# Altium PCB PC110.PcbDoc (part 11 of 24)
Units mm, origin at the board's own origin, x right, y up, seen from the top; angles counter-clockwise.
Board outline 150.05 x 107.35 mm, 10 copper layers (In2.Cu, F.Cu, B.Cu, In1.Cu, In3.Cu, In4.Cu, In5.Cu, In6.Cu, In7.Cu, In8.Cu); 936 components, 1434 nets, 4891 pads, 6088 vias.
Unrouted connection lines stored in the file: 2995.
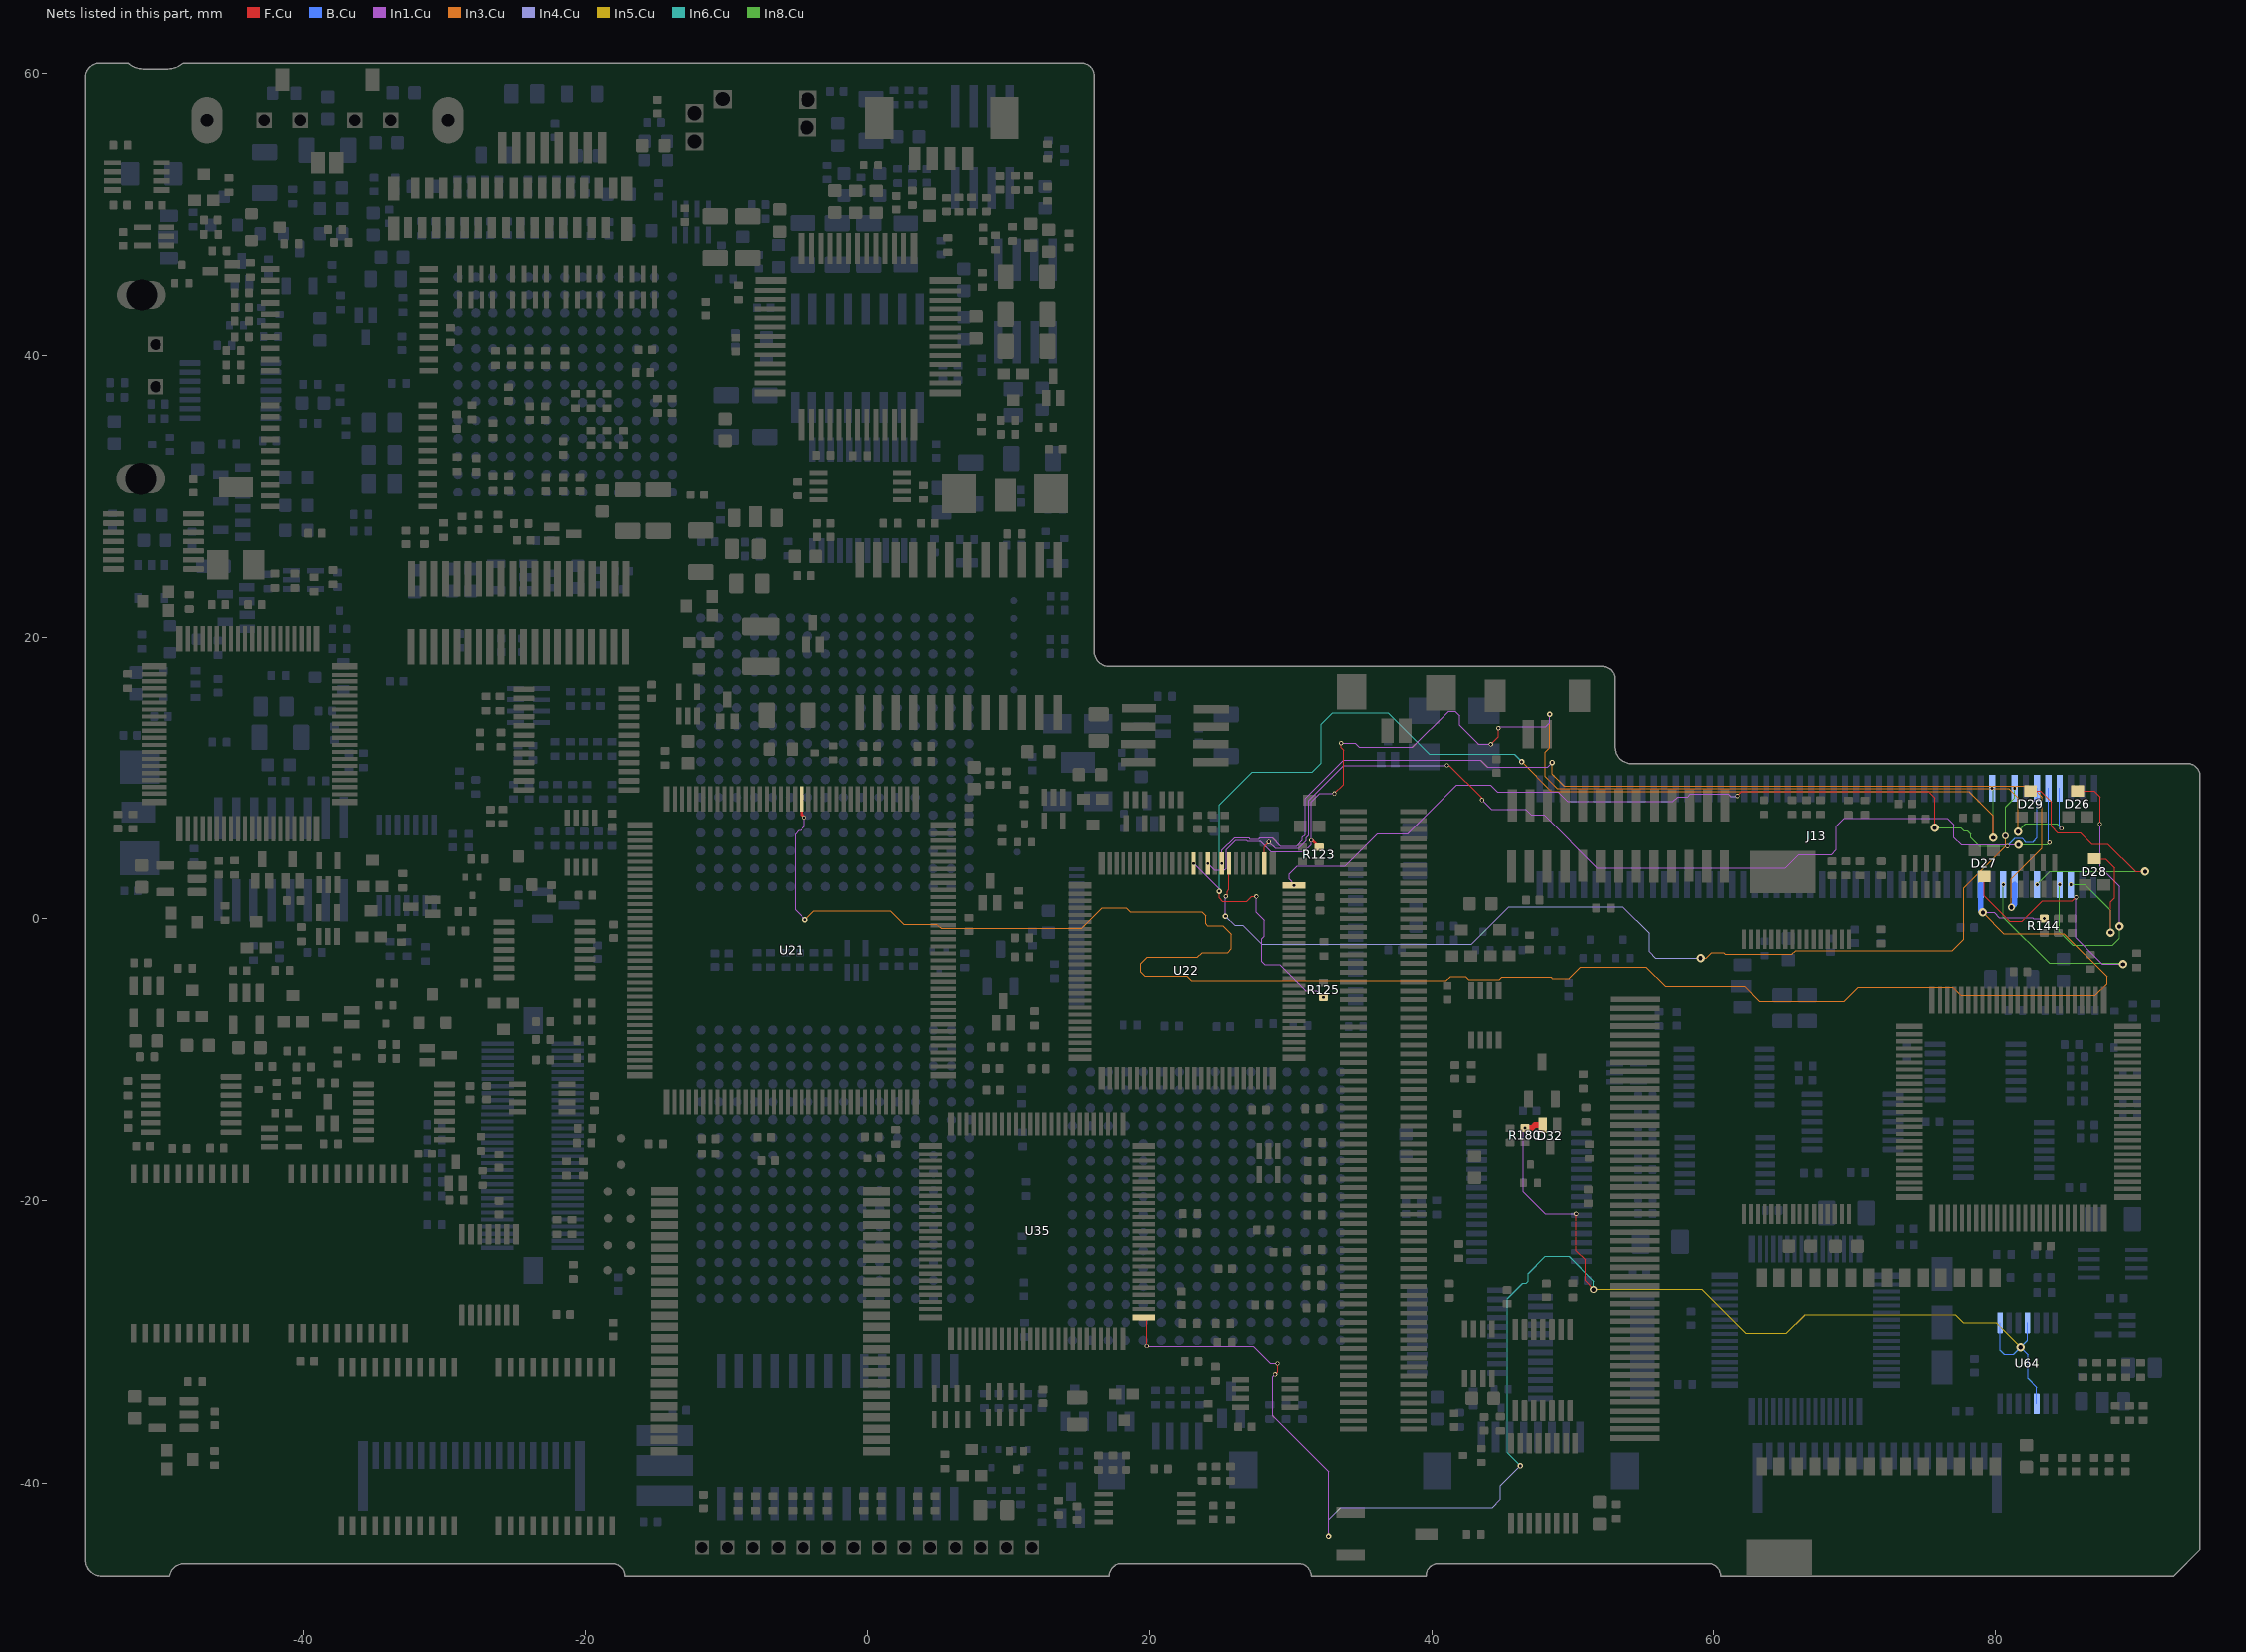
[diagram p18: the nets of this part, all layers, seen from the top]

## Via types
v1: diameter 0.3, hole 0.2, B.Cu to In8.Cu, tented both sides, 1934 vias
v2: diameter 0.4, hole 0.2, F.Cu to B.Cu, tented both sides, 1902 vias
v3: diameter 0.3, hole 0.2, F.Cu to In1.Cu, tented both sides, 1729 vias
v4: diameter 0.6, hole 0.3, F.Cu to B.Cu, tented both sides, 354 vias
v5: diameter 0.5, hole 0.3, F.Cu to B.Cu, tented both sides, 136 vias
v6: diameter 0.4, hole 0.2, B.Cu to In8.Cu, tented both sides, 12 vias
v7: diameter 0.3, hole 0.2, F.Cu to B.Cu, tented both sides, 6 vias
v8: diameter 0.6, hole 0.2, F.Cu to B.Cu, tented both sides, 4 vias
v9: diameter 0.5, hole 0.2, B.Cu to In8.Cu, tented both sides, 3 vias
v10: diameter 0.5, hole 0.2, F.Cu to B.Cu, tented both sides, 2 vias
v11: diameter 0.4, hole 0.3, F.Cu to B.Cu, tented both sides, 2 vias
v12: diameter 0.3, hole 0.2, F.Cu to In4.Cu, tented both sides, 2 vias
v13: diameter 0.6, hole 0.3, B.Cu to In8.Cu, tented both sides, 1 vias
v14: diameter 0.3, hole 0.2, F.Cu to In3.Cu, tented both sides, 1 vias

## Nets (pads, with @x,y where several pads share a name; then routed paths per layer and width w, separated by ;. In a path a pad name is that pad's centre, name@x,y a point inside that pad or via, vN(x,y) a via of type N, cw(c..) or ccw(c..) an arc to the next point about the centre after c; other vN are vias at no path point) (continued)
FDC_UART1_EN: D32.1 R180.2 U35.76 U64.1 U64.4 U64.10 | length 123.7
  F.Cu w0.08: U35.76@19.61,-28.25 19.82,-28.46 v3(19.82,-30.26) ; v3(28.9,-32.27) 29.07,-32.1 v3(29.07,-31.5) ; v3(50.27,-20.91) 50.27,-23.52 50.92,-24.17 50.92,-25.66 51.5,-26.24 v5(51.5,-26.28) ; v5@51.44,-26.34 v5@51.44,-26.29
  F.Cu w0.4: v3(46.64,-14.78) 47.14,-14.78 47.35,-14.57 D32.1@47.91,-14.57
  In1.Cu w0.08: v3(19.82,-30.26) 19.83,-30.27 27.34,-30.27 28.57,-31.5 v3(29.07,-31.5) ; v3(28.9,-32.27) 28.73,-32.44 28.73,-35.2 32.68,-39.15 v2(32.68,-43.8) ; v3(46.64,-14.78) 46.5,-14.92 46.5,-19.35 48.06,-20.91 v3(50.27,-20.91)
  In4.Cu w0.08: v2(32.68,-43.8) 32.68,-42.63 33.54,-41.77 44.32,-41.77 44.9,-41.19 44.9,-40.14 v2(46.3,-38.74)
  In5.Cu w0.08: v5(51.5,-26.28) 51.52,-26.26 59.14,-26.26 62.26,-29.38 65.19,-29.38 66.52,-28.05 77.12,-28.05 77.7,-28.63 80.03,-28.63 v4(81.76,-30.36)
  In6.Cu w0.08: v2(46.3,-38.74) 45.39,-37.83 45.39,-26.91 46.47,-25.83 46.72,-25.83 46.86,-25.69 46.86,-25.14 48.08,-23.92 49.75,-23.92 51.5,-25.67 v5(51.5,-26.28)
  B.Cu w0.08: U64.1@80.31,-28.627 80.31,-30.56 80.6,-30.85 81.27,-30.85 v4(81.76,-30.36) ; U64.4@82.26,-28.627 82.26,-29.86 v4(81.76,-30.36) ; U64.10@82.91,-34.353 82.91,-33.19 82.28,-32.56 82.28,-30.88 v4(81.76,-30.36)
FDC_WDATA#: J13.8 U22.7 | length 73.3
  F.Cu w0.08: v3(25.41,1.61) 25.5,1.7 25.5,1.96 25.63,2.09 U22.7@25.63,3.94
  In1.Cu w0.08: v2(25.38,0.19) 25.38,1.58 v3(25.41,1.61)
  In3.Cu w0.08: v4(59.05,-2.77) 59.47,-2.77 59.84,-2.4 60.7,-2.4 60.8,-2.5 65.58,-2.5 65.85,-2.23 76.91,-2.23 77.72,-1.42 77.72,2.2 80.69,5.17 v5(80.69,5.9)
  In4.Cu w0.08: v2(25.38,0.19) 26.03,-0.46 26.61,-0.46 27.94,-1.79 42.84,-1.79 45.5,0.87 53.53,0.87 55.42,-1.02 55.42,-2.33 55.86,-2.77 v4(59.05,-2.77)
  In8.Cu w0.08: v5(80.69,5.9) 80.69,7.97 81.34,8.62 v1(81.34,9.3)
FDC_WGATE#: J13.93 U22.8 | length 76.2
  In1.Cu w0.08: v3(25.13,3.94) 25.13,4.88 26.03,5.78 27.03,5.78 27.12,5.69 27.74,5.69 27.82,5.77 28.69,5.77 29.265,5.195 30.415,5.195 30.825,5.605 30.825,5.805 31.02,6 31.02,8.57 33.76,11.31 43.47,11.31 43.97,10.81 48.24,10.81 v2(48.56,11.13)
  In3.Cu w0.08: v2(48.56,11.13) 48.56,10.31 49.41,9.46 82.51,9.46 83.29,8.68 83.29,5.02 81.11,2.84 v5(81.11,0.83)
  B.Cu w0.4: v5(81.11,0.83) 81.34,1.06 J13.93@81.34,2.45
FDC_WRTPRT#: J13.10 R125.1 U22.12 | length 89.9
  F.Cu w0.08: v2(24.94,1.97) 24.94,1.49 25.16,1.27 26.9,1.27 27.23,1.6 v3(27.57,1.6)
  In1.Cu w0.08: v3(23.13,3.94) 24.94,2.13 v2(24.94,1.97) ; v3(27.57,1.6) 27.57,0.46 28.12,-0.09 28.12,-1.23 27.94,-1.41 27.94,-3.01 28.15,-3.22 29.23,-3.22 31.07,-5.06 31.85,-5.06 v3(32.32,-5.53)
  In3.Cu w0.08: v2(46.4,11.18) 48.5,9.08 78.09,9.08 79.82,7.35 v4(79.82,5.77)
  In6.Cu w0.08: v2(24.94,1.97) 24.94,8.1 27.29,10.45 31.54,10.45 32.17,11.08 32.17,13.84 32.99,14.66 36.89,14.66 39.84,11.71 45.87,11.71 v2(46.4,11.18)
  In8.Cu w0.08: v1(79.74,9.3) 79.82,9.22 v4(79.82,5.77)
FDD_Bowman: J13.90 R144.2 U21.125 | length 139.7
  F.Cu w0.25: U21.125@-4.68,8.535 -4.68,7.42 v3(-4.48,7.22)
  In1.Cu w0.08: v3(-4.48,7.22) -4.48,6.58 -4.76,6.3 -4.88,6.3 -5.14,6.04 -5.14,0.65 v2(-4.43,-0.06) ; v4(79.09,0.46) 79.89,0.46 80.26,0.09 82.61,0.09 82.67,0.03 v3(83.44,0.03)
  In3.Cu w0.08: v2(-4.43,-0.06) -3.8,0.57 1.63,0.57 2.56,-0.36 4.91,-0.36 5.215,-0.665 15.155,-0.665 16.6,0.78 18.38,0.78 18.66,0.5 23.72,0.5 23.98,0.24 23.98,-0.35 24.1,-0.47 25.21,-0.47 25.81,-1.07 25.81,-2.11 25.55,-2.37 23.73,-2.37 23.38,-2.72 19.84,-2.72 19.4,-3.16 19.4,-3.77 19.67,-4.04 22.65,-4.04 22.98,-4.37 41.05,-4.37 41.34,-4.08 42.41,-4.08 42.63,-4.3 44.81,-4.3 44.985,-4.125 48.495,-4.125 48.58,-4.21 49.77,-4.21 50.57,-3.41 55.19,-3.41 56.54,-4.76 62.16,-4.76 63.21,-5.81 69.29,-5.81 70.27,-4.83 76.94,-4.83 77.52,-5.41 87.06,-5.41 87.9,-4.57 87.9,-4.09 84.84,-1.03 80.58,-1.03 v4(79.09,0.46)
  B.Cu w0.4: J13.90@78.94,2.45 78.94,0.61 v4(79.09,0.46)
FDD_DRSEL: J13.5 U22.2 | length 72.1
  F.Cu w0.08: U22.2@28.13,3.94 28.13,5.15 v3(28.45,5.47) ; v3(41.09,10.92) 41.26,10.92 43.58,8.6 v3(43.58,8.46)
  In1.Cu w0.08: v3(28.45,5.47) 28.895,5.025 30.565,5.025 31.105,5.565 31.105,5.785 31.26,5.94 31.26,8.43 33.75,10.92 v3(41.09,10.92) ; v3(43.58,8.46) 44.26,7.78 46.69,7.78 47.08,7.39 48,7.39 51.75,3.64 65.1,3.64 66.055,4.595 68.385,4.595 68.71,4.92 68.71,6.59 69.29,7.17 76.57,7.17 77.04,6.7 77.04,5.77 77.54,5.27 v4(81.61,5.27)
  In8.Cu w0.08: v4(81.61,5.27) 83.66,5.27 v1(83.82,5.43)
  B.Cu w0.08: J13.5@83.74,9.3 83.74,5.51 v1(83.82,5.43)
FDD_INDEX#: J13.4 R123.2 U22.10 | length 85.7
  F.Cu w0.08: v3(33.09,8.92) 33.75,9.58 33.75,12.01 33.57,12.19 v3(33.57,12.5) ; v3(44.21,12.42) 44.75,12.96 v3(44.75,13.56)
  F.Cu w0.2: v3(31.45,5.59) 31.53,5.59 R123.2@32.02,5.1
  In1.Cu w0.08: v3(24.13,3.94) 24.6,3.47 25.31,3.47 25.44,3.6 25.44,4.93 26.11,5.6 26.86,5.6 26.94,5.52 27.86,5.52 28.6,4.78 30.93,4.78 31.45,5.3 v3(31.45,5.59) 31.45,8.32 32.05,8.92 v3(33.09,8.92) ; v3(33.57,12.5) 34.56,12.5 34.85,12.21 38.64,12.21 41.2,14.77 41.66,14.77 41.98,14.45 41.98,13.76 43.32,12.42 v3(44.21,12.42) ; v3(44.75,13.56) 44.87,13.68 48.12,13.68 48.39,13.95 v2(48.39,14.55)
  In3.Cu w0.08: v2(48.39,14.55) 48.39,12.18 48.07,11.86 48.07,10.13 48.93,9.27 80.92,9.27 81.58,8.61 v4(81.58,6.21)
  In8.Cu w0.08: v4(81.58,6.21) 82.13,6.76 84.34,6.76 v1(84.66,6.44)
  B.Cu w0.08: J13.4@84.54,9.3 84.54,6.56 v1(84.66,6.44)
FDD_MOTEN: J13.6 U22.100 | length 64.6
  F.Cu w0.08: v3(61.66,8.75) 61.98,9.07 75.21,9.07 75.67,8.61 v4(75.67,6.47)
  In1.Cu w0.08: v3(30.23,2.39) 30.23,2.48 29.88,2.83 29.88,3.2 30.46,3.78 33.87,3.78 36.15,6.06 38.31,6.06 41.78,9.53 44.17,9.53 44.66,9.04 48.99,9.04 49.67,8.36 57.1,8.36 57.43,8.69 58.13,8.69 58.32,8.88 61,8.88 61.18,8.7 61.61,8.7 v3(61.66,8.75)
  In8.Cu w0.08: v4(75.67,6.47) 77.53,6.47 77.74,6.26 77.97,6.26 78.22,6.01 78.22,5.78 78.82,5.18 v1(80.82,5.18)
  B.Cu w0.08: v1(80.82,5.18) 81.38,5.74 81.86,5.74 82.13,5.47 82.64,5.47 82.94,5.77 J13.6@82.94,9.3
FDD_Pluto1: D28.2 J13.98 | length 11.5
  F.Cu w0.08: D28.2@87.02,4.275 87.795,4.275 88.43,3.64 88.43,1.49 88.16,1.22 v4(88.16,-0.96)
  In8.Cu w0.08: v1(85.34,2.45) 86.31,2.45 88.16,0.6 v4(88.16,-0.96)
FDD_Pluto2: D26.2 J13.97 | length 20.6
  F.Cu w0.08: D26.2@85.81,9.105 86.985,9.105 87.41,8.68 v3(87.41,6.76)
  In1.Cu w0.08: v3(87.41,6.76) 87.41,3.7 88.79,2.32 v4(88.79,-0.53)
  In8.Cu w0.08: v1(84.54,2.45) 84.54,-0.9 85.49,-1.85 88.29,-1.85 88.79,-1.35 v4(88.79,-0.53)
FDD_Pluto3: D29.2 J13.95 | length 19.6
  F.Cu w0.08: D29.2@82.48,9.095 83.175,9.095 83.94,8.33 83.94,6.59 84.39,6.14 86,6.14 86.83,5.31 87.97,5.31 89.92,3.36 v4(90.62,3.36)
  In8.Cu w0.08: v1(82.94,2.45) 83.85,3.36 v4(90.62,3.36)
FDD_Pluto4: D27.2 J13.92 | length 28.5
  F.Cu w0.08: D27.2@79.19,3.015 79.19,1.63 80.97,-0.15 81.88,-0.15 83.31,1.28 85.44,1.28 v3(85.7,1.54)
  In1.Cu w0.08: v3(85.7,1.54) 85.7,-1.33 87.58,-3.21 v4(89.05,-3.21)
  In8.Cu w0.08: v1(80.54,2.45) 80.54,0.14 83.81,-3.13 88.97,-3.13 v4(89.05,-3.21)